# Altium PCB Battery Level Indicator.PcbDoc
Units mil, origin at the board's own origin, x right, y up, seen from the top; angles counter-clockwise.
Board outline 3175 x 1100 mil, 2 copper layers (Top Layer, Bottom Layer); 16 components, 14 nets, 49 pads, 0 vias.
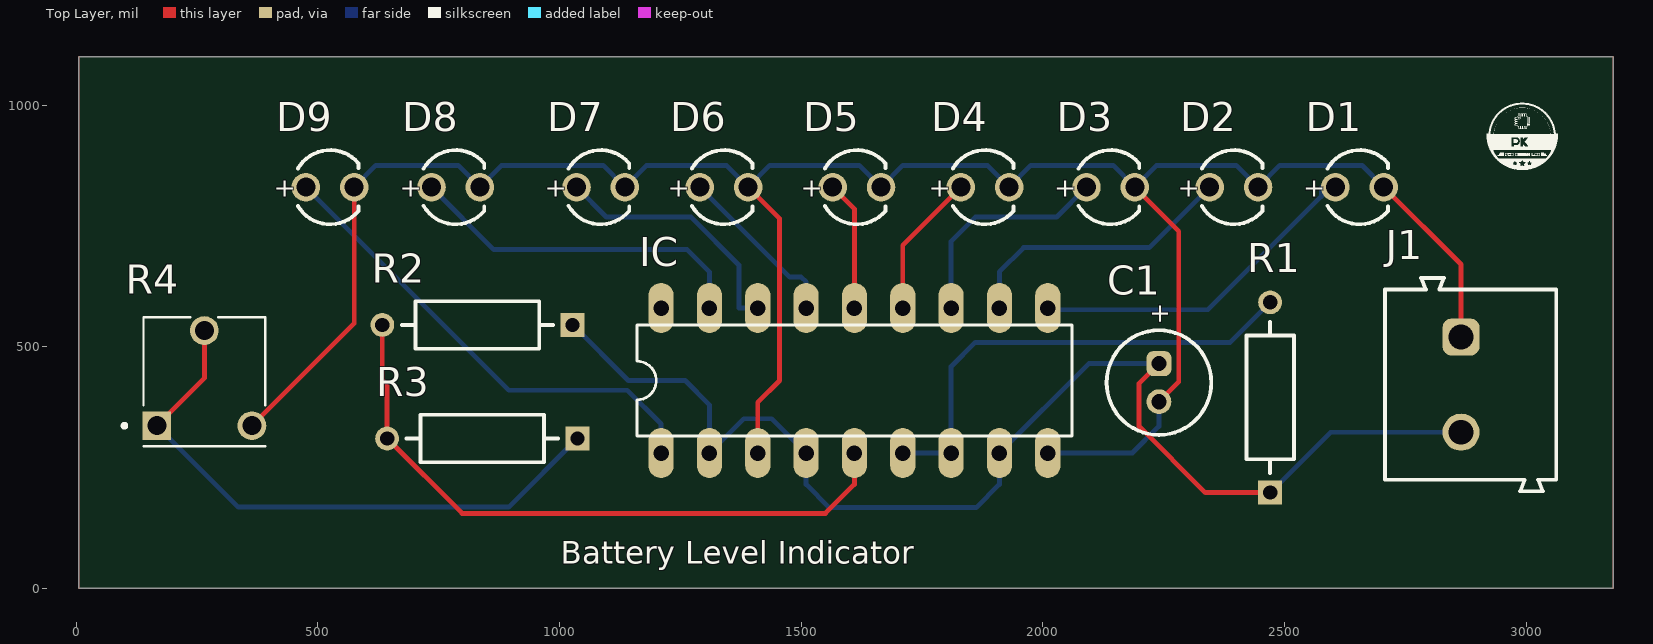
[diagram p0: Top Layer view]
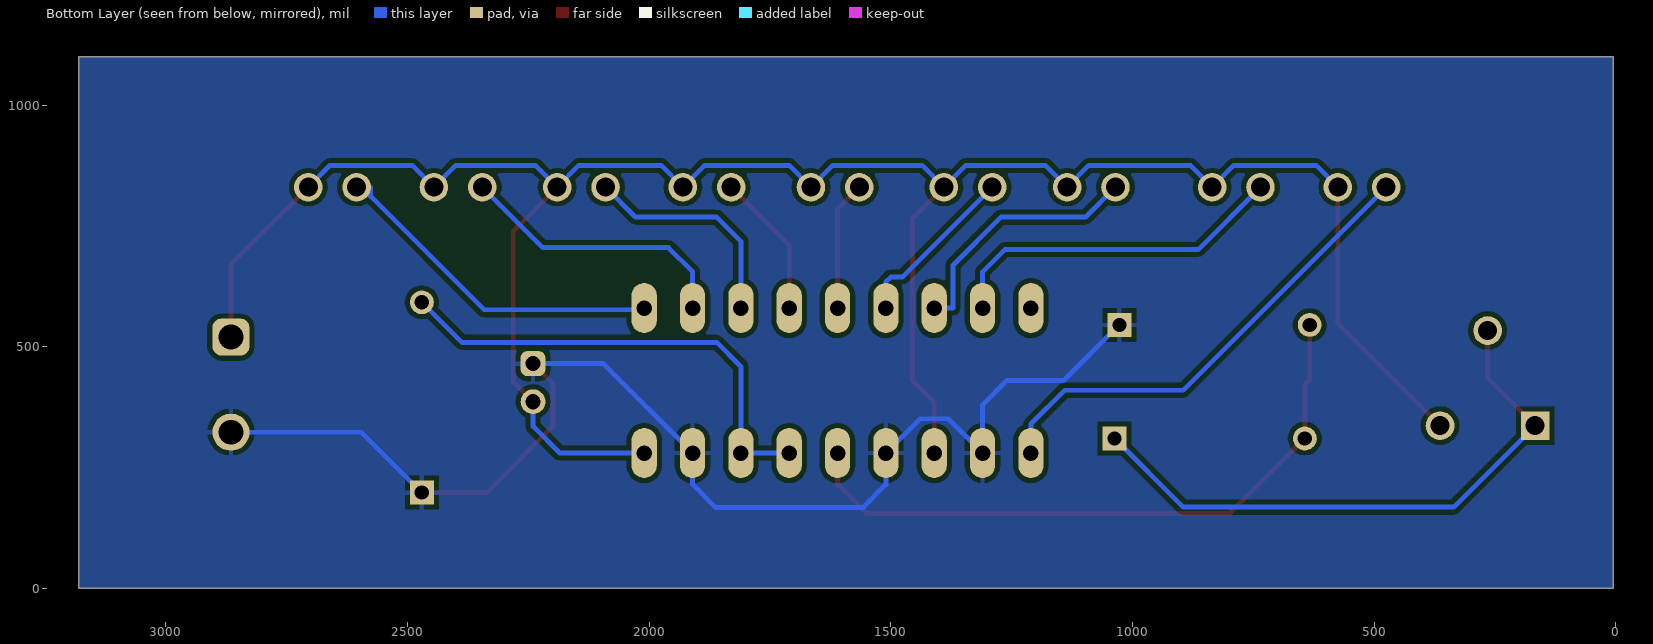
[diagram p1: Bottom Layer view, seen from below]

## Layer stack, top to bottom
Top Solder: solder mask 0.4, Solder Resist, Dk 3.5
Top Layer: signal copper 1.4
Dielectric 1: dielectric 12.6, FR-4, Dk 4.8
Bottom Layer: signal copper 1.4
Bottom Solder: solder mask 0.4, Solder Resist, Dk 3.5

## Board outline
5,0 3180,0 3180,1100 5,1100

## Design rules (kind name [scope] priority, off if disabled: settings)
Clearance [All] p1: gap=6 ignorepadtopadclearanceinfootprint=FALSE
PolygonConnect [All] p1: connectstyle=Relief reliefconductorwidth=10 reliefentries=4 polygonreliefangle="90 Angle" airgapwidth=10
RoutingVias [All] p1: holewidth=20 width=40 viastyle="Through Hole" minholewidth=20 minwidth=40 maxholewidth=20 maxwidth=40
SilkToSilkClearance [All] p1: silktosilkclearance=5
SilkToSolderMaskClearance [IsPad] p1: minsilkscreentomaskgap=2 clearancetoexposedcopper=TRUE
SolderMaskExpansion [All] p1: expansion=4 istentingtop=FALSE
Width [All] p1: maxlimit=10 minlimit=3 preferedwidth=10
28 further rules are at their usual default settings.

## Components (designator, comment, footprint, x,y, rotation, side; value= is the part's Value field where it differs from the comment)
C1 "860130272001" WCAP-ATET_D5H11 -47760,50425.63 r90 top
D1 "15400385A3590" WL-TIRW_D3.9H5.3 52655,50830 r0 top
D2 "15400385A3590" WL-TIRW_D3.9H5.3 52395,50830 r0 top
D3 "15400385A3590" WL-TIRW_D3.9H5.3 52140,50830 r0 top
D4 "15400385A3590" WL-TIRW_D3.9H5.3 51880,50830 r0 top
D5 "15400385A3590" WL-TIRW_D3.9H5.3 51615,50830 r0 top
D6 "15400385A3590" WL-TIRW_D3.9H5.3 51340,50830 r0 top
D7 "15400385A3590" WL-TIRW_D3.9H5.3 51085,50830 r0 top
D8 "15400385A3590" WL-TIRW_D3.9H5.3 50785,50830 r0 top
D9 "15400385A3590" WL-TIRW_D3.9H5.3 50525,50830 r0 top
IC "LM3914N" DIL18 1610,430 r0 top
J1 "691101710002" 691101710002 52884.69,-49578.43 r270 top
R1 "MRS25000C1000FRP00" FP-MRS25-MFG 2470,395 r90 top
R2 "MRS25000C1000FRP00" FP-MRS25-MFG 830,545 r180 top
R3 "MRS25000C1000FRP00" FP-MRS25-MFG 840,310 r180 top
R4 "EVN-D8AA03B14" TRIM_EVN-D8AA03B14 265,435 r0 top

## Footprints (in the part's own frame and the unit in brackets; to place one, negate y for a bottom-side part, rotate by r counter-clockwise, add the part's x,y. Pads: shape width x height; smd on the part's side, far side on the other; paste and mask are expansions set on the pad)
691101710002 [mm] "5,00mm - modular - blue - Horizontal entry with pressure clamp - 12,6mm height - 02p"
  rrect50% 1.95x1.95 hole 1.3: 1(-1272.5,-1270.5)
  round 1.95 hole 1.3: 2(-1267.5,-1270.5)
  silkscreen extent -1275.6,-1274.5 -1264.4,-1265.5, body extent -1275.6,-1274.5 -1264.4,-1265.5, height 12.65
DIL18 [mil]
  oval 52x104 hole 32: 1(-400,-150) 2(-300,-150) 3(-200,-150) 4(-100,-150) 5(0,-150) 6(100,-150) 7(200,-150) 8(300,-150) 9(400,-150) 10(400,150) 11(300,150) 12(200,150) 13(100,150) 14(0,150) 15(-100,150) 16(-200,150) 17(-300,150) 18(-400,150)
  silkscreen extent -450,-115 450,115, body extent -455,-192 445,182, height 172
FP-MRS25-MFG [mm]
  rect 1.25x1.25 hole 0.75 paste-2539.97 mask+0: 1(-5,0)
  round 1.25 hole 0.75 paste-2539.97 mask+0: 2(5,0)
  silkscreen extent -3.97,-1.25 3.97,1.25, body extent -5.72,-1.35 5.72,1.35, height 0.25
TRIM_EVN-D8AA03B14 [mm]
  rect 1.508x1.508 / inner round 1.508 / far side rect 1.508x1.508 hole 1: 1(-2.5,-2.5)
  round 1.508 hole 1: 2(0,2.5) 3(2.5,-2.5)
  silkscreen extent -4.3,-3.57 3.2,3.2, body extent -3.17,-3.62 3.23,3.68, height 6.35
WCAP-ATET_D5H11 [mm] "Aluminum Electrolytic Capacitors, 5x11mm"
  rrect50% 1.3x1.3 hole 0.8: 1(-1269,-1270)
  round 1.3 hole 0.8: 2(-1271,-1270)
  silkscreen extent -1272.75,-1272.75 -1267.25,-1267.25, body extent -1272.49,-1272.5 -1267.5,-1267.5, height 11.26
WL-TIRW_D3.9H5.3 [mm] "THT Infrared Round Waterclear, body diameter 3.9mm"
  round 1.5 hole 1: 1(-1268.73,-1270) 2(-1271.27,-1270)
  silkscreen extent -1271.69,-1271.95 -1268.5,-1268.05, body extent -1271.95,-1271.95 -1268.38,-1268.05, height 5.33

## Part data
C1: library part CMP-03913-54218058-1, "860130272001 WCAP-ATET Aluminum Electrolytic Capacitors", Capacitance=47µF, Case/Package=Radial, Leakage Current=4.7µA, Max Operating Temperature=125°C, Min Operating Temperature=-40°C, Ripple Current=92mA, Tolerance=20%, Voltage Rating=10V, Diameter=5mm, Height=11mm, Height - Seated (Max)=12.4968mm, Lead Pitch=2.0066mm, Length=11mm, Life (Hours)=1000hours, Material=Aluminium, Mount="Through Hole", NexarPartId=54218058, Packaging="Tape & Box (TB)", Pitch=2mm, Polarity=Polar, RoHS=Compliant, Voltage Rating (DC)=10V
D1 D2 D3 D4 D5 D6 D7 D8 D9: library part CMP-03913-82270983-1, "15400385A3590 WL-TIRW THT Infrared Round Waterclear", Forward Current=1A, Forward Voltage=1.5V, Max Reverse Voltage (DC)=5V, NexarPartId=82270983, Packaging=Bulk, Peak Wavelength=850nm, RoHS=Non-Compliant, Viewing Angle=35°, Wavelength=850nm
IC: "LED Lighting Drivers", Package=None, Availability=Unavailable, MF="Texas Instruments", MP=LM3914N, Price=None, SnapEDA_Link=https://www.snapeda.com/parts/LM3914N/Texas%20Instruments/view-part/4652973/?ref=snap
J1: library part CMP-1502-03256-2, Color=Blue, Current=16A, Max Operating Temperature=105°C, Min Operating Temperature=-40°C, Voltage=250V, Contact Material=Brass, Contact Plating=Tin, Current Rating=16A, Height=16.4mm, Housing Material=Nylon, Lead Pitch=5mm, Length=9mm, Mount="Through Hole", NexarPartId=8917704, Number of Contacts=2, Number of Levels=1, Number of Pins=2, Number of Positions Per Level=2, Packaging=Box, Pitch=5.0038mm, Plating=Steel, REACH SVHC=Unknown, RoHS=Compliant, Stripping Length=-7mm, Termination=Screw, Voltage Rating=250V, Width=11.2mm, Wire Gauge (Max)=26AWG, Wire Gauge (Min)=14AWG, Wire/Cable Gauge=26AWG
R1 R2 R3: library part CMP-00030-42757237-1, "MRS25000C1000FRP00 Resistor, 100 Ohm, ± 1%, 600 mW, Axial Leaded, Metal Film (Thin Film), Professional", Case/Package=Axial, Max Operating Temperature=155°C, Max Power Dissipation=600mW, Min Operating Temperature=-55°C, Resistance=100Ω, Temperature Coefficient=50ppm/°C, Tolerance=1%, Voltage Rating=350V, Composition="Metal Film, Thin Film", Contact Plating=Tin, Diameter=2.5mm, Lead Diameter=600µm, Lead Free="Lead Free", Length=6.5mm, Military Standard=Not, Mount="Through Hole", NexarPartId=42757237, Number of Pins=2, Number of Terminations=2, Packaging="Tape & Reel (TR)", Power Rating=600mW, Radiation Hardening=No, REACH SVHC=Unknown, RoHS=Compliant, Schedule B="8533210090, 8533210090", Termination=Axial, Voltage Rating (DC)=350V, Width=2.5mm
R4: "10 kOhms 0.1W, 1/10W PC Pins Through Hole Trimmer Potentiometer Carbon 1.0 Turn Top Adjustment", Package="PQFP-44 Panasonic", Availability="In Stock", Check_prices=https://www.snapeda.com/parts/EVN-D8AA03B14/Panasonic+Electronic+Components/view-part/?ref=eda, MF="Panasonic Electronic", MP=EVN-D8AA03B14, Price=None, Purchase-URL=https://pricing.snapeda.com/search/part/EVN-D8AA03B14/?ref=eda, SnapEDA_Link=https://www.snapeda.com/parts/EVN-D8AA03B14/Panasonic+Electronic+Components/view-part/?ref=snap

## Nets (pads, with @x,y where several pads share a name; then routed paths per layer and width w, separated by ;. In a path a pad name is that pad's centre, name@x,y a point inside that pad or via, vN(x,y) a via of type N, cw(c..) or ccw(c..) an arc to the next point about the centre after c; other vN are vias at no path point)
GND: C1.1 IC.2 IC.4 IC.8 J1.2 R1.1 R2.1 | length 2608.2
  Top Layer w10: C1.1 2199,424 2199,335 2335.85,198.15 R1.1
  Bottom Layer w10: R2.1 1141.85,430 1260,430 1310,380 IC.2 1381,351 1439,351 IC.4 1510,215 1558,167 1862,167 1910,215 IC.8 2095,465 C1.1 ; R1.1 2595,323.15 J1.2
NetD1_2: D1.2 IC.10 | length 714.9
  Bottom Layer w10: IC.10 2010,576.32 2341.32,576.32 2576,811 2576,830 D1.2
NetD2_2: D2.2 IC.11 | length 582.5
  Bottom Layer w10: IC.11 1910,655 1960,705 2220,705 D2.2
NetD3_2: D3.2 IC.12 | length 464.4
  Bottom Layer w10: IC.12 1810,718 1860,768 2028,768 D3.2
NetD4_2: D4.2 IC.13 | length 299.7
  Top Layer w10: IC.13 1710,710 D4.2
NetD5_2: D5.2 IC.14 | length 268.6
  Top Layer w10: D5.2 1610,785 IC.14
NetD6_2: D6.2 IC.15 | length 355.2
  Bottom Layer w10: D6.2 1476,644 1500,644 1510,634 IC.15
NetD7_2: D7.2 IC.16 | length 530.7
  Bottom Layer w10: D7.2 1097,768 1272,768 1371,669 1371,580 IC.16
NetD8_2: D8.2 IC.17 | length 722.5
  Bottom Layer w10: D8.2 864,701 1264,701 1310,655 IC.17
NetD9_2: D9.2 IC.1 | length 998
  Bottom Layer w10: D9.2 895,410 1140,410 1210,340 IC.1
NetIC_5: IC.5 R2.2 R3.2 | length 1360
  Top Layer w10: R2.2 633.15,432 643.15,422 R3.2 798.15,155 1550,155 1610,215 IC.5
NetIC_6: IC.6 IC.7 R1.2 | length 994
  Bottom Layer w10: IC.6 IC.7 1810,459 1860,509 2387.15,509 R1.2
NetR3_1: R3.1 R4.1 R4.2 | length 1236.5
  Top Layer w10: R4.1 265,435 R4.2
  Bottom Layer w10: R4.1 335.15,168 894.85,168 R3.1
VCC: C1.2 D1.1 D2.1 D3.1 D4.1 D5.1 D6.1 D7.1 D8.1 D9.1 IC.3 IC.9 J1.1 R4.3 | length 4783.6
  Top Layer w10: R4.3 575,548.15 D9.1 ; D6.1 1455,765 1455,430 1410,385 IC.3 ; D3.1 2281,739 2281,427.26 C1.2 ; D1.1 2865,670 J1.1
  Bottom Layer w10: D9.1 620,875 790,875 D8.1 880,875 1090,875 D7.1 1180,875 1345,875 D6.1 1435,875 1620,875 D5.1 1710,875 1885,875 D4.1 1975,875 2145,875 D3.1 2235,875 2400,875 D2.1 2490,875 2660,875 D1.1 ; IC.9 2185,280 2240,335 C1.2
pads on no net: IC.18

## Polygon pours and split planes (outlines as drawn)
GND on Bottom Layer "GND_L02_P000" (solid, remove dead copper, pour order 0): 5,0 3180,0 3180,1100 5,1100
no net on Top Layer "NONET_L01_P001" (solid, remove dead copper, pour order 1): 5,0 3180,0 3180,1100 5,1100

## Silkscreen, mask and mechanical layers (free items; w line width, h text height)
Top Overlay:
  drawing of 22 lines, arcs and shapes, not listed
  text "Battery Level Indicator" at 1002.5,35 h80

## Text inside footprints (layer, text, board x,y; h text height)
C1: Top Overlay "+" at 2259.69,545.71 h39.37 r90
D1: Top Overlay "+" at 2538.86,810.32 h40
D2: Top Overlay "+" at 2278.86,810.32 h40
D3: Top Overlay "+" at 2023.86,810.32 h40
D4: Top Overlay "+" at 1763.86,810.32 h40
D5: Top Overlay "+" at 1498.86,810.32 h40
D6: Top Overlay "+" at 1223.86,810.32 h40
D7: Top Overlay "+" at 968.86,810.32 h40
D8: Top Overlay "+" at 668.86,810.32 h40
D9: Top Overlay "+" at 408.86,810.32 h40